# Altium PCB PCB1.PcbDoc
Units mil, origin at the board's own origin, x right, y up, seen from the top; angles counter-clockwise.
Board outline 6000 x 4000 mil, 2 copper layers (Top Layer, Bottom Layer); 33 components, 51 nets, 154 pads, 4 vias.
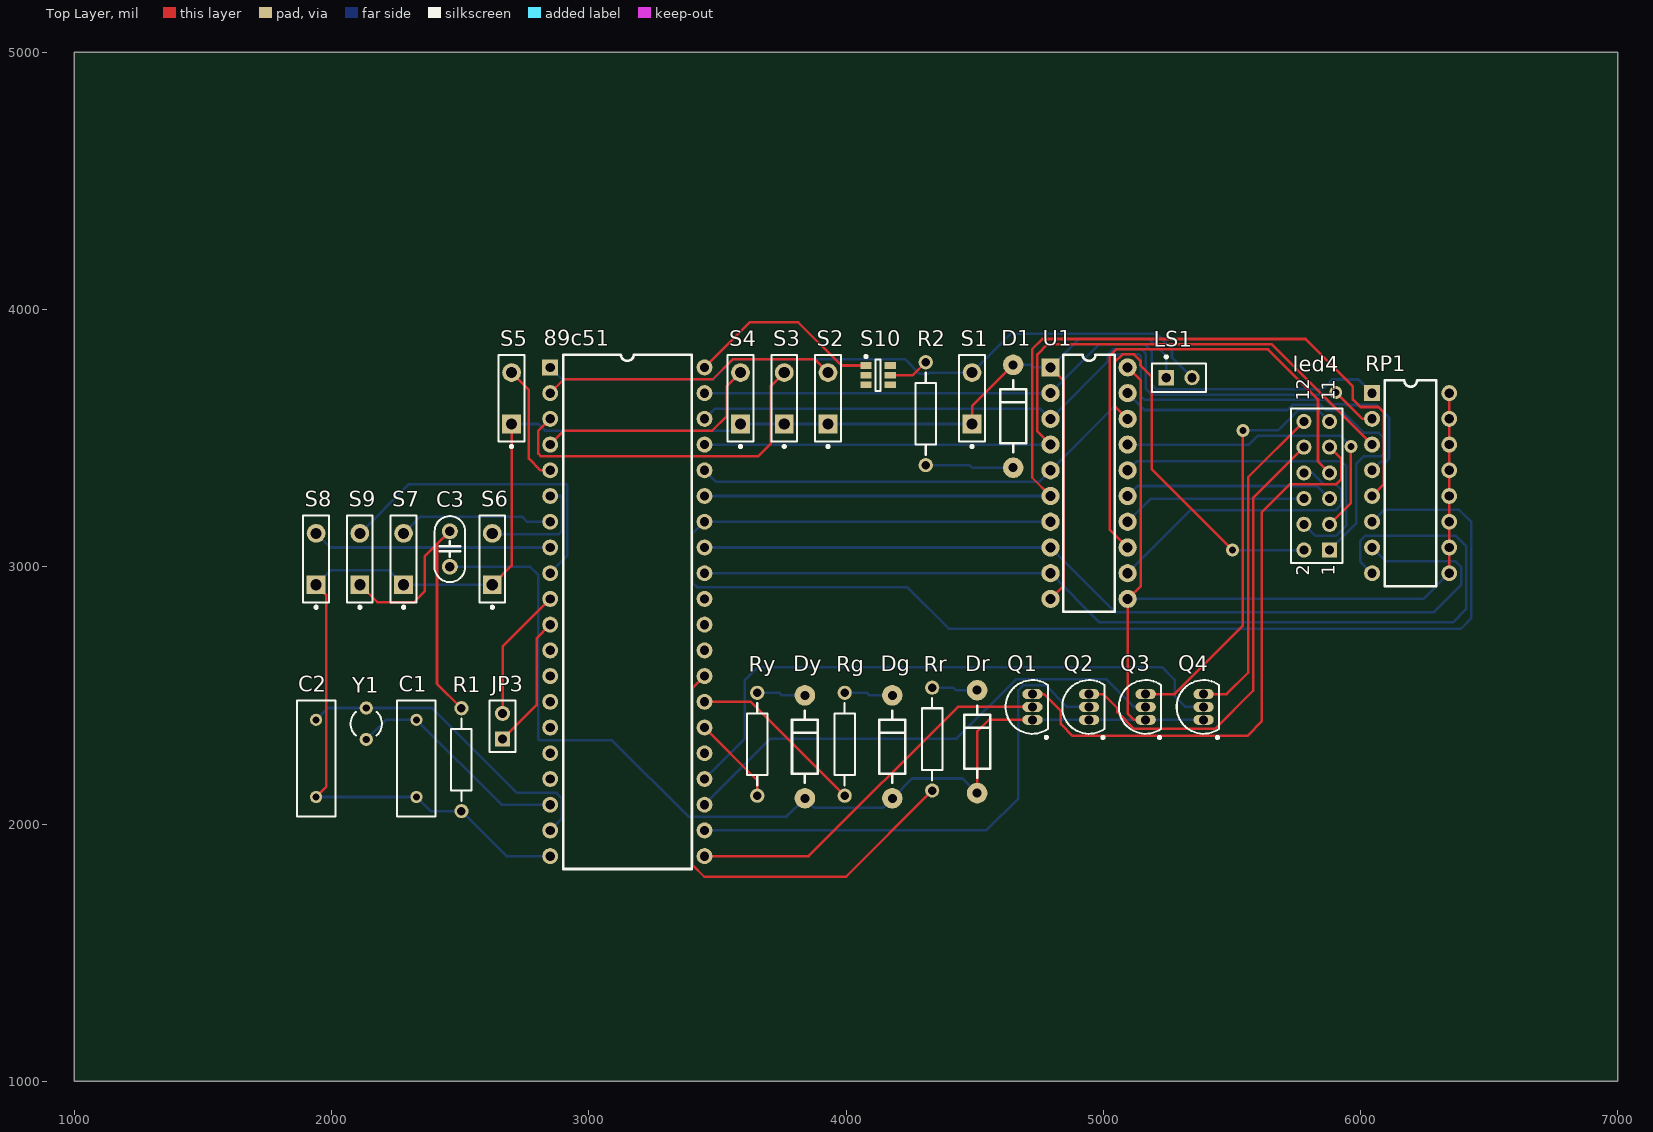
[diagram p0: Top Layer view]
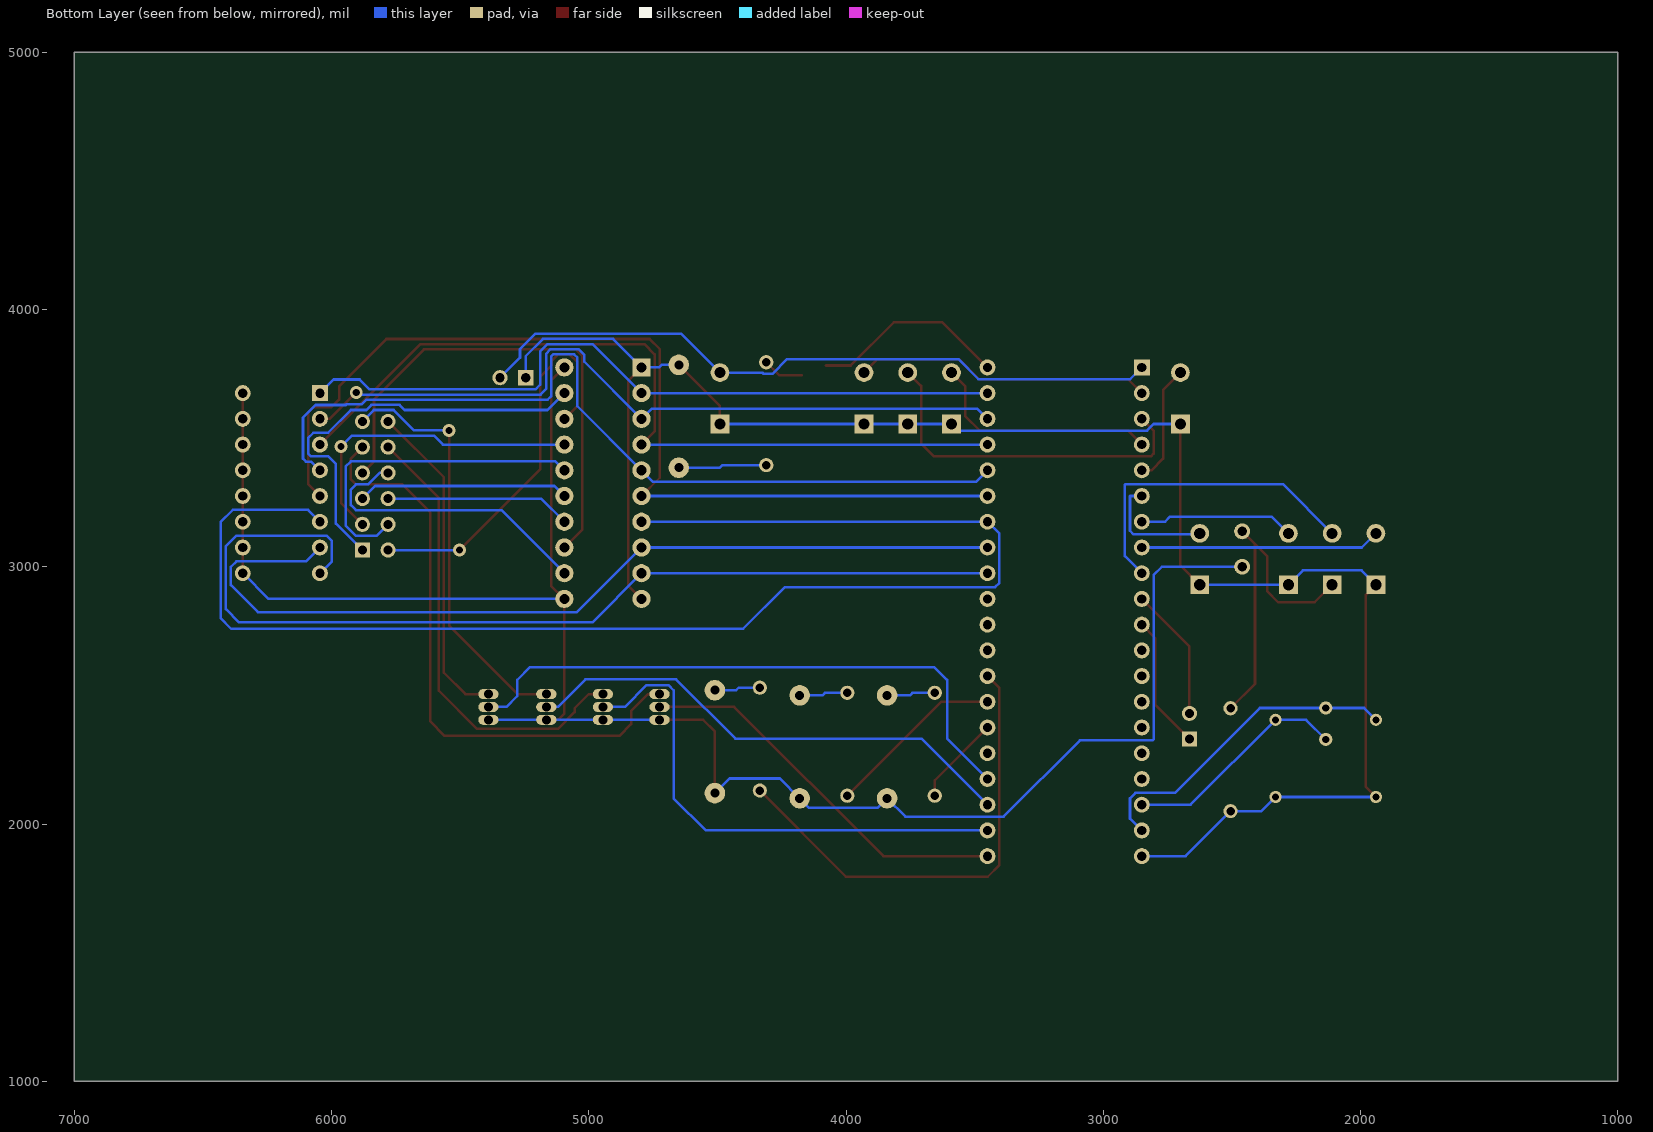
[diagram p1: Bottom Layer view, seen from below]

## Layer stack, top to bottom
Top Layer: signal copper 1.4
Dielectric: dielectric 12.6, FR-4, Dk 4.8
Bottom Layer: signal copper 1.4

## Board outline
1000,1000 7000,1000 7000,5000 1000,5000

## Design rules (kind name [scope] priority, off if disabled: settings)
Clearance [All] p1: gap=10
PolygonConnect [All] p1: connectstyle=Relief reliefconductorwidth=10 reliefentries=4 polygonreliefangle="90 Angle" airgapwidth=10
RoutingVias [All] p1: holewidth=28 width=50 viastyle="Through Hole" minholewidth=28 minwidth=50 maxholewidth=28 maxwidth=50
SolderMaskExpansion [All] p1: expansion=4
Width [All] p1: maxlimit=10 minlimit=10 preferedwidth=10
28 further rules are at their usual default settings.

## Components (designator, comment, footprint, x,y, rotation, side; value= is the part's Value field where it differs from the comment)
89c51 "89C51" DIP40 2850,3775 r0 top
C1 "30p" RAD-0.3 2330,2255 r90 top
C2 "30p" RAD-0.3 1940,2255 r90 top
C3 "10u" cap 2460,3000 r90 top
D1 "发光二极管" DIODE0.4A 4670,3585 r90 top
Dg "发光二极管阵列" DIODE0.4A 4200,2300 r90 top
Dr "发光二极管阵列" DIODE0.4A 4530,2320 r90 top
Dy "发光二极管阵列" DIODE0.4A 3860,2300 r90 top
JP3 "下载电路" HDR1X2 2665,2330 r90 top
led4 "LED4_1" HDR2X6 5880,3065 r90 top
LS1 "Bell" PIN2 5245,3735 r0 top
Q1 "NPN" TO-226-AA 4725,2455 r0 top
Q2 "NPN" TO-226-AA 4945,2455 r0 top
Q3 "NPN" TO-226-AA 5165,2455 r0 top
Q4 "NPN" TO-226-AA 5390,2455 r0 top
R1 "R1" AXIAL-0.4 2505,2250 r90 top
R2 "470" AXIAL-0.4 4310,3595 r90 top
Rg "Res2" AXIAL-0.4 3995,2310 r90 top
RP1 "八位排阻330" DIP16 6045,3675 r0 top
Rr "Res2" AXIAL-0.4 4335,2330 r90 top
Ry "Res2" AXIAL-0.4 3655,2310 r90 top
S1 "SW-PB" SPST-2 4490,3655 r90 top
S2 "SW-PB" SPST-2 3930,3655 r90 top
S3 "SW-PB" SPST-2 3760,3655 r90 top
S4 "SW-PB" SPST-2 3590,3655 r90 top
S5 "SW-PB" SPST-2 2700,3655 r90 top
S6 "SW-PB" SPST-2 2625,3030 r90 top
S7 "SW-PB" SPST-2 2280,3030 r90 top
S8 "SW-PB" SPST-2 1940,3030 r90 top
S9 "SW-PB" SPST-2 2110,3030 r90 top
S10 "SW DPDT" SOT23-6_N 4125,3745 r0 top
U1 "74HC573" DIP-20 4795,3775 r0 top
Y1 "XTAL" R38 2135,2390 r0 top

## Footprints (in the part's own frame and the unit in brackets; to place one, negate y for a bottom-side part, rotate by r counter-clockwise, add the part's x,y. Pads: shape width x height; smd on the part's side, far side on the other; paste and mask are expansions set on the pad)
AXIAL-0.4 [mm] "Axial Device, Thru-Hole; 2 Leads; 0.4 in Pin Spacing"
  round 1.4 hole 0.85: 1(-5.08,0) 2(5.08,0)
  silkscreen extent -4.06,-1.02 4.06,1.02
cap [mil]
  round 62 hole 36: 1(0,0) 2(137.8,0)
  silkscreen extent -59,-60 197,60
DIODE0.4A [mil]
  round 80 hole 35: A(-200,20) K(200,20)
  silkscreen extent -140,-30 140,70
DIP16 [mil]
  rect 62x62 hole 36: 1(0,0)
  round 62 hole 36: 2(0,-100) 3(0,-200) 4(0,-300) 5(0,-400) 6(0,-500) 7(0,-600) 8(0,-700) 9(300,-700) 10(300,-600) 11(300,-500) 12(300,-400) 13(300,-300) 14(300,-200) 15(300,-100) 16(300,0)
  silkscreen extent 50,-750 250,50
DIP40 [mil]
  rect 62x62 hole 36: 1(0,0)
  round 62 hole 36: 2(0,-100) 3(0,-200) 4(0,-300) 5(0,-400) 6(0,-500) 7(0,-600) 8(0,-700) 9(0,-800) 10(0,-900) 11(0,-1000) 12(0,-1100) 13(0,-1200) 14(0,-1300) 15(0,-1400) 16(0,-1500) 17(0,-1600) 18(0,-1700) 19(0,-1800) 20(0,-1900) 21(600,-1900) 22(600,-1800) 23(600,-1700) 24(600,-1600) 25(600,-1500) 26(600,-1400) 27(600,-1300) 28(600,-1200) 29(600,-1100) 30(600,-1000) 31(600,-900) 32(600,-800) 33(600,-700) 34(600,-600) 35(600,-500) 36(600,-400) 37(600,-300) 38(600,-200) 39(600,-100) 40(600,0)
  silkscreen extent 50,-1950 550,50
DIP-20 [mm]
  rect 1.8x1.8 hole 1: 1(0,0)
  round 1.8 hole 1: 2(0,-2.54) 3(0,-5.08) 4(0,-7.62) 5(0,-10.16) 6(0,-12.7) 7(0,-15.24) 8(0,-17.78) 9(0,-20.32) 10(0,-22.86) 11(7.62,-22.86) 12(7.62,-20.32) 13(7.62,-17.78) 14(7.62,-15.24) 15(7.62,-12.7) 16(7.62,-10.16) 17(7.62,-7.62) 18(7.62,-5.08) 19(7.62,-2.54) 20(7.62,0)
  silkscreen extent 1.27,-24.13 6.35,1.27
HDR1X2 [mm] "Connector; Header; 2 Position"
  rect 1.5x1.5 hole 0.9: 1(0,0)
  round 1.5 hole 0.9: 2(2.54,0)
  silkscreen extent -1.27,-1.27 3.81,1.27
HDR2X6 [mm] "Connector; Header; 6x2 Position"
  rect 1.5x1.5 hole 0.9: 1(0,0)
  round 1.5 hole 0.9: 2(0,2.54) 3(2.54,0) 4(2.54,2.54) 5(5.08,0) 6(5.08,2.54) 7(7.62,0) 8(7.62,2.54) 9(10.16,0) 10(10.16,2.54) 11(12.7,0) 12(12.7,2.54)
  silkscreen extent -1.27,-1.27 13.97,3.81
PIN2 [mm] "Photosensitive Diode; 2 Leads"
  rect 1.5x1.5 hole 0.9: 1(0,0)
  round 1.5 hole 0.9: 2(2.54,0)
  silkscreen extent -1.4,-1.4 3.94,2.17
R38 [mm] "Crystal, Thru-Hole; 2 Leads; Body 3.1 x 8.2 mm (Dia.xH)"
  round 1.3 hole 0.7: 1(0,1.55) 2(0,-1.55)
  silkscreen extent -1.55,-1.19 1.55,1.17
RAD-0.3 [mm] "Radial Cap, Thru-Hole; 2 Leads; 0.3 in Pin Spacing"
  round 1.2 hole 0.7: 1(-3.81,0) 2(3.81,0)
  silkscreen extent -5.71,-1.91 5.71,1.91
SOT23-6_N [mm] "SOT23, 6-Leads, Body 2.9x1.6mm, Pitch 0.95mm, Lead Span 2.7mm, IPC Medium Density"
  rect 1.1x0.65 smd: 1(-1.2,0.95) 2(-1.2,0) 3(-1.2,-0.95) 4(1.2,-0.95) 5(1.2,0) 6(1.2,0.95)
  silkscreen extent -1.32,-1.55 0.25,1.95, body extent -0.9,-1.55 0.9,1.55, height 1.45
SPST-2 [mm] "Switch; 2 Leads"
  rect 1.85x1.85 hole 1.1: 1(-2.54,0)
  round 1.85 hole 1.1: 2(2.54,0)
  silkscreen extent -4.89,-1.27 4.28,1.27
TO-226-AA [mm] "TO, Flat Index; 3 In-Line, Axial Leads; Body Dia. 4.8mm; Leads 0.55 x 0.51 mm (max)"
  oval 2x1 hole 0.9: 1(0,-1.27) 2(0,0) 3(0,1.27)
  silkscreen extent -2.65,-3.13 1.52,2.65, body extent -2.66,-2.66 1.52,2.66, height 5.33

## Part data
C1 C2: library part Cap, "Capacitor"
C3: library part 电解电容, "Capacitor"
Dg Dr Dy: library part 发光二极管
JP3: library part "Header 2", "Header, 2-Pin"
led4: library part LED4_LWQ
LS1: "Electrical Bell"
Q1 Q2 Q3 Q4: "NPN Bipolar Transistor"
R1 R2: library part Res2, "Resistor"
Rg Rr Ry: "Resistor"
RP1: library part RESPACK4
S1 S2 S3 S4 S5 S6 S7 S8 S9 S10: "Switch"
Y1: "Crystal Oscillator"

## Via types
v1: diameter 50, hole 28, Top Layer to Bottom Layer, 4 vias

## Nets (pads, with @x,y where several pads share a name; then routed paths per layer and width w, separated by ;. In a path a pad name is that pad's centre, name@x,y a point inside that pad or via, vN(x,y) a via of type N, cw(c..) or ccw(c..) an arc to the next point about the centre after c; other vN are vias at no path point)
+5V: S10.6
GND: 89c51.20 C1.1 C2.1 D1.K LS1.1 R1.1 S1.1 S2.1 S3.1 S4.1 S5.1 S6.1 S7.1 S8.1 U1.1 U1.10 | length 7072.1
  Top Layer w10: C2.1 1979,2144 1979,2891 S8.1 ; S6.1 2700,3005 S5.1 ; S1.1 4490,3625 D1.K ; U1.10 4846,2926 4846,3724 U1.1
  Bottom Layer w10: C2.1 C1.1 2385,2050 R1.1 2680,1875 89c51.20 ; S8.1 1996,2986 2224,2986 S7.1 S6.1 ; S5.1 2804,3555 2830,3529 3590,3529 S4.1 S3.1 S2.1 S1.1 ; D1.K 4717,3785 4727,3775 U1.1 4905.72,3885.72 5178.49,3885.72 5245,3819.2 LS1.1
Net89c51_9: 89c51.9 S9.2 | length 1257.3
  Bottom Layer w10: S9.2 2301,3321 2914,3321 2916,3319 2916,3041 89c51.9
Net89c51_10: 89c51.10 JP3.2 | length 521.6
  Top Layer w10: JP3.2 2665,2690 89c51.10
Net89c51_11: 89c51.11 JP3.1 | length 521.6
  Top Layer w10: JP3.1 2797,2462 2797,2722 89c51.11
Net89c51_18: 89c51.18 C1.2 Y1.2 | length 883.2
  Bottom Layer w10: Y1.2 2211.02,2405 C1.2 2660,2075 89c51.18
Net89c51_19: 89c51.19 C2.2 Y1.1 | length 1264.5
  Bottom Layer w10: C2.2 1986.02,2451.02 Y1.1 2390.98,2451.02 2721,2121 2875,2121 2896,2100 2896,2021 89c51.19
Net89c51_32: 89c51.32 RP1.8 U1.9 | length 3888
  Bottom Layer w10: 89c51.32 U1.9 4986,2784 6360,2784 6411,2835 6411,3080 6370,3121 6020,3121 5999,3100 5999,3021 RP1.8
Net89c51_33: 89c51.33 RP1.7 U1.8 | length 3536.5
  Bottom Layer w10: 89c51.33 U1.8 5046,2824 6286,2824 6391,2929 6391,3000 6370,3021 6099,3021 RP1.7
Net89c51_34: 89c51.34 RP1.6 U1.7 | length 5518.3
  Bottom Layer w10: U1.7 89c51.34 3404,3129 3404,2937 3420,2921 4238,2921 4400,2759 6390,2759 6431,2800 6431,3174 6384,3221 6091,3221 RP1.6
Net89c51_35: 89c51.35 RP1.5 U1.6 | length 3820.9
  Top Layer w10: U1.6 4724,3346 4724,3846 4763.43,3885.43 5786.57,3885.43 5970.63,3701.37 5970.63,3650.37 6000,3621 6070,3621 6091,3600 6091,3321 RP1.5
  Bottom Layer w10: 89c51.35 U1.6
Net89c51_36: 89c51.36 RP1.4 U1.5 | length 3433.1
  Bottom Layer w10: 89c51.36 3495,3330 4750,3330 U1.5 5044,3624 5044,3813 5056.72,3825.72 5138.49,3825.72 5145.72,3818.49 5145.72,3663.22 5159.4,3649.53 5864.53,3649.53 5883.06,3631 5942.53,3631 5944.53,3629 6062,3629 6111,3580 6111,3420 6100,3409 6079,3409 RP1.4
Net89c51_37: 89c51.37 RP1.3 U1.4 | length 3196.2
  Top Layer w10: U1.4 4744,3526 4744,3826 4783.43,3865.43 5654.57,3865.43 RP1.3
  Bottom Layer w10: 89c51.37 U1.4
Net89c51_38: 89c51.38 RP1.2 U1.3 | length 2954.5
  Top Layer w10: v1(5904,3678) 6007,3575 RP1.2
  Bottom Layer w10: 89c51.38 3490,3615 4755,3615 U1.3 5017,3797 5017,3822.72 5040,3845.72 5148,3845.72 5165.72,3828 5165.72,3691.43 5187.62,3669.53 5895.53,3669.53 v1(5904,3678)
Net89c51_39: 89c51.39 RP1.1 U1.2 | length 2860.4
  Bottom Layer w10: 89c51.39 U1.2 4985.72,3865.72 5159.72,3865.72 5188.93,3836.5 5188.93,3707.6 5207,3689.53 5852.56,3689.53 5891.03,3728 5992,3728 RP1.1
Net89c51_40: 89c51.40 S10.1 | length 769.7
  Top Layer w10: 89c51.40 3625,3950 3814.4,3950 3982,3782.4 S10.1
NetC3_2: C3.2 R1.2 S9.1 | length 1249.1
  Top Layer w10: S9.1 2178,2862 2320,2862 2362,2904 2362,3039.8 2410,3087.8 ; C3.2 2410,3087.8 ; R1.2 2410,2545 2410,3087.8
NetD1_A: D1.A R2.1 | length 344.1
  Bottom Layer w10: R2.1 4480,3395 4490,3385 D1.A
NetDg_K: Dg.K Rg.2 | length 189.1
  Bottom Layer w10: Rg.2 4082,2510 4092,2500 Dg.K
NetDr_K: Dr.K Rr.2 | length 179.1
  Bottom Layer w10: Rr.2 4417,2530 4427,2520 Dr.K
NetDy_K: Dy.K Ry.2 | length 189.1
  Bottom Layer w10: Ry.2 3742,2510 3752,2500 Dy.K
NetR2_2: R2.2 S10.5 | length 158.5
  Top Layer w10: S10.5 4260,3745 R2.2
P0_0: led4.1 U1.19 | length 1647.3
  Bottom Layer w10: U1.19 5160.47,3609.53 5715.47,3609.53 5735.47,3629.53 5844.53,3629.53 5864.53,3609.53 5925,3609.53 6013.53,3521 6070,3521 6091,3500 6091,3440 6080,3429 6012,3429 5983,3400 5983,3168 led4.1
P0_1: led4.2 U1.18 | length 1525.5
  Top Layer w10: U1.18 5044.57,3625.43 5044.57,3795.89 5074.11,3825.43 5120,3825.43 5145,3800.43 5145,3783 5188,3740 5188,3380 v1(5503,3065)
  Bottom Layer w10: v1(5503,3065) led4.2
P0_2: led4.3 U1.17 | length 1236.7
  Top Layer w10: led4.3 5963,3248 v1(5963,3467)
  Bottom Layer w10: U1.17 5567,3475 5602,3510 5920,3510 v1(5963,3467)
P0_3: led4.4 U1.16 | length 1303
  Bottom Layer w10: U1.16 5130,3410 5925,3410 5945,3390 5945,3160 5905,3120 5825,3120 led4.4
P0_4: led4.5 U1.15 | length 821.5
  Bottom Layer w10: U1.15 5134,3314 5831,3314 led4.5
P0_5: led4.6 U1.14 | length 722.3
  Bottom Layer w10: U1.14 5185,3265 led4.6
P0_6: led4.7 U1.13 | length 1980.3
  Top Layer w10: U1.13 5024.57,3145.43 5024.57,3820 5050,3845.43 5640.57,3845.43 5835,3651 5835,3410 led4.7
P0_7: led4.8 U1.12 | length 1171.7
  Bottom Layer w10: U1.12 5340,3220 5905,3220 5925,3240 5925,3300 5905,3320 5858,3320 5813,3365 led4.8
P1_0: 89c51.1 LS1.2 S1.2 | length 2725.1
  Bottom Layer w10: 89c51.1 2896,3729 3485,3729 3563,3807 4229,3807 4286,3750 4320,3750 4325,3755 S1.2 4641,3906 5207.51,3906 5267.28,3846.23 5267.28,3812.72 LS1.2
P1_1: 89c51.2 S2.2 | length 1156.2
  Top Layer w10: 89c51.2 2904,3729 3482,3729 3560,3807 3878,3807 S2.2
P1_2: 89c51.3 S3.2 | length 1380.3
  Top Layer w10: 89c51.3 2804,3529 2804,3440 2815,3429 3657,3429 3708,3480 3708,3703 S3.2
P1_3: 89c51.4 S4.2 | length 923.9
  Top Layer w10: 89c51.4 2904,3529 3480,3529 3536,3585 3536,3701 S4.2
P1_4: 89c51.5 S5.2 | length 464.3
  Top Layer w10: S5.2 2767,3688 2767,3420.15 2812.15,3375 89c51.5
P1_5: 89c51.6 S6.2 | length 459.5
  Bottom Layer w10: S6.2 2629,3126 2882,3126 2896,3140 2896,3275 89c51.6
P1_6: 89c51.7 S7.2 | length 605.2
  Bottom Layer w10: S7.2 2345,3195 2740,3195 2760,3175 89c51.7
P1_7: 89c51.8 S8.2 | length 932.8
  Bottom Layer w10: S8.2 1995,3075 89c51.8
P2_0: 89c51.21 Q1.2 | length 1515.2
  Top Layer w10: 89c51.21 3855,1875 4435,2455 Q1.2
P2_0_1: led4.9 Q1.3 | length 2329.8
  Top Layer w10: Q1.3 4770,2505 4835,2440 4835,2388 4880,2343 5560,2343 5617,2400 5617,3212 5725,3320 5905,3320 5925,3340 5925,3420 led4.9
P2_1: 89c51.22 Q2.2 | length 2010.3
  Bottom Layer w10: 89c51.22 4545,1975 4670,2100 4670,2520 4690,2540 4775,2540 4860,2455 Q2.2
P2_1_1: led4.10 Q2.3 | length 1792.6
  Top Layer w10: Q2.3 5000,2505 5055,2450 5055,2435 5120,2370 5435,2370 5583,2518 5583,3268 led4.10
P2_2: 89c51.23 Q3.2 | length 1961
  Bottom Layer w10: 89c51.23 3707,2332 4430,2332 4660,2562 5013,2562 5120,2455 Q3.2
P2_2_1: led4.11 Q3.3 | length 1635.6
  Top Layer w10: Q3.3 5277,2505 5543,2771 v1(5543,3530)
  Bottom Layer w10: v1(5543,3530) 5679,3530 5758.53,3609.53 5835.47,3609.53 led4.11
P2_3: 89c51.24 Q4.2 | length 2354.8
  Bottom Layer w10: 89c51.24 3607,2332 3607,2560 3657,2610 5228,2610 5278,2560 5278,2497 5320,2455 Q4.2
P2_3_1: led4.12 Q4.3 | length 1274.3
  Top Layer w10: Q4.3 5480,2505 5563,2588 5563,3348 led4.12
P2_4: 89c51.25
P2_5: 89c51.26 Ry.1 | length 349.9
  Top Layer w10: 89c51.26 3655,2170 Ry.1
P2_6: 89c51.27 Rg.1 | length 696.2
  Top Layer w10: 89c51.27 3630,2475 Rg.1
P2_7: 89c51.28 Rr.1 | length 1842.5
  Top Layer w10: 89c51.28 3404,2529 3404,1840 3449,1795 4000,1795 Rr.1
VCC: C3.1 Dg.A Dr.A Dy.A Q1.1 Q2.1 Q3.1 Q4.1 RP1.9 RP1.10 RP1.11 RP1.12 RP1.13 RP1.14 RP1.15 RP1.16 U1.11 U1.20 | length 7539.8
  Top Layer w10: Dr.A 4510,2360 4555,2405 Q1.1 ; U1.20 5146,3724 5146,2926 U1.11 5095,2430 5120,2405 Q3.1 ; RP1.9 RP1.10 RP1.11 RP1.12 RP1.13 RP1.14 RP1.15 RP1.16
  Bottom Layer w10: C3.1 2772,3000 2804,2968 2804,2329 2808,2325 3091,2325 3387,2029 3769,2029 Dy.A 3877,2063 4143,2063 Dg.A 4257,2177 4453,2177 Dr.A ; Q1.1 Q2.1 Q3.1 Q4.1 ; U1.11 6245,2875 RP1.9
pads on no net: 89c51.12 89c51.13 89c51.14 89c51.15 89c51.16 89c51.17 89c51.29 89c51.30 89c51.31 S10.2 S10.3 S10.4

## Text inside footprints (layer, text, board x,y; h text height)
led4: Top Overlay "12" at 5800,3645 h50 r90; Top Overlay "1" at 5900,3685 h50 r90; Top Overlay "1" at 5900,3645 h50 r90; Top Overlay "1" at 5900,2965 h50 r90; Top Overlay "2" at 5800,2965 h50 r90